# Altium PCB PCB1.PcbDoc
Units mil, origin at the board's own origin, x right, y up, seen from the top; angles counter-clockwise.
Board outline 3700 x 3405 mil, 4 copper layers (Top Layer, Layer 1, Layer 2, Bottom Layer), stack 23.756 mil thick; 98 components, 46 nets, 351 pads, 49 vias.
Unrouted connection lines stored in the file: 89.
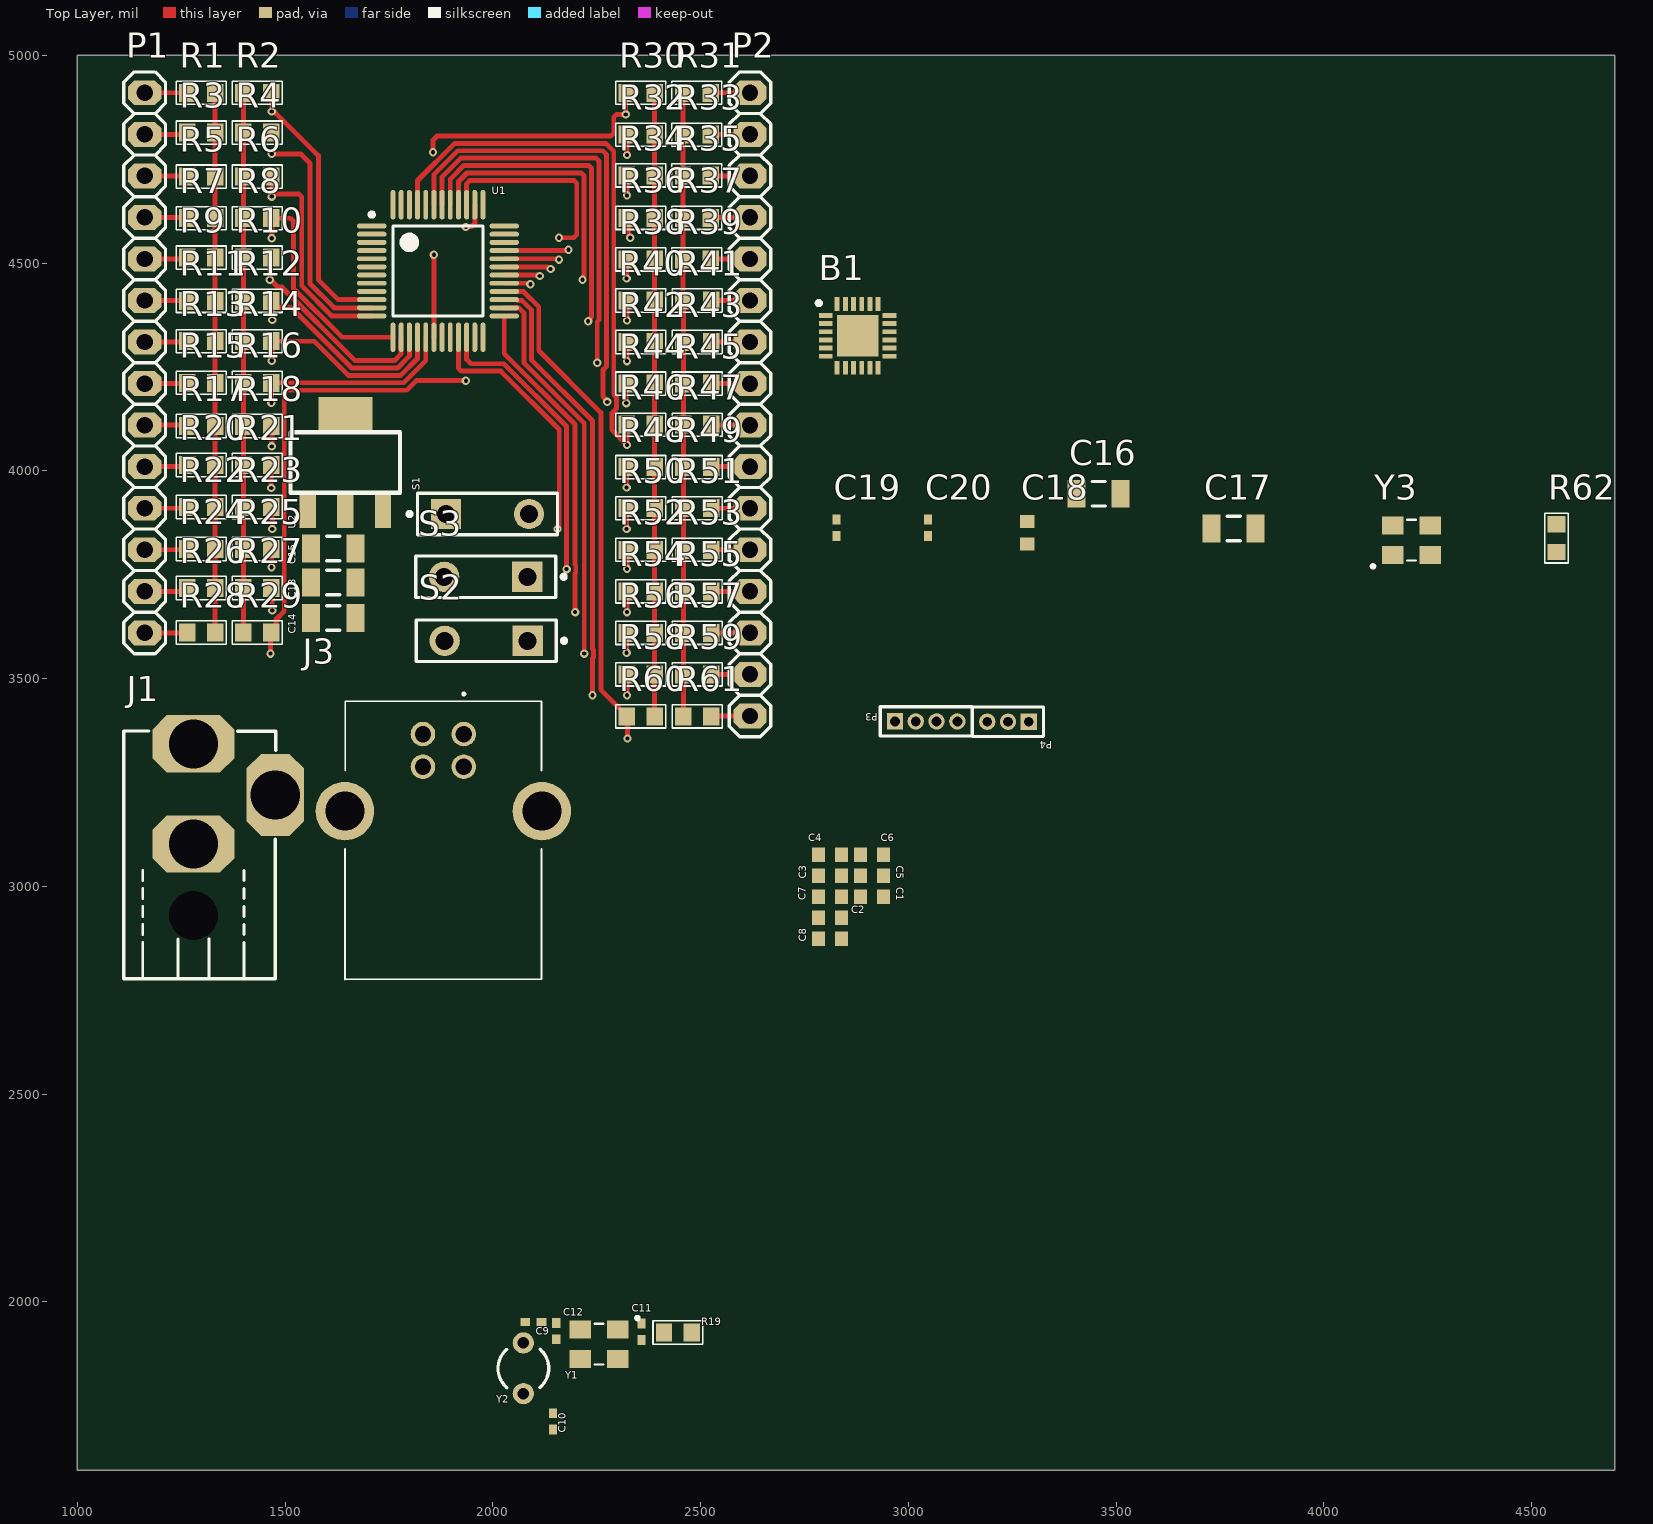
[diagram p0: Top Layer view]
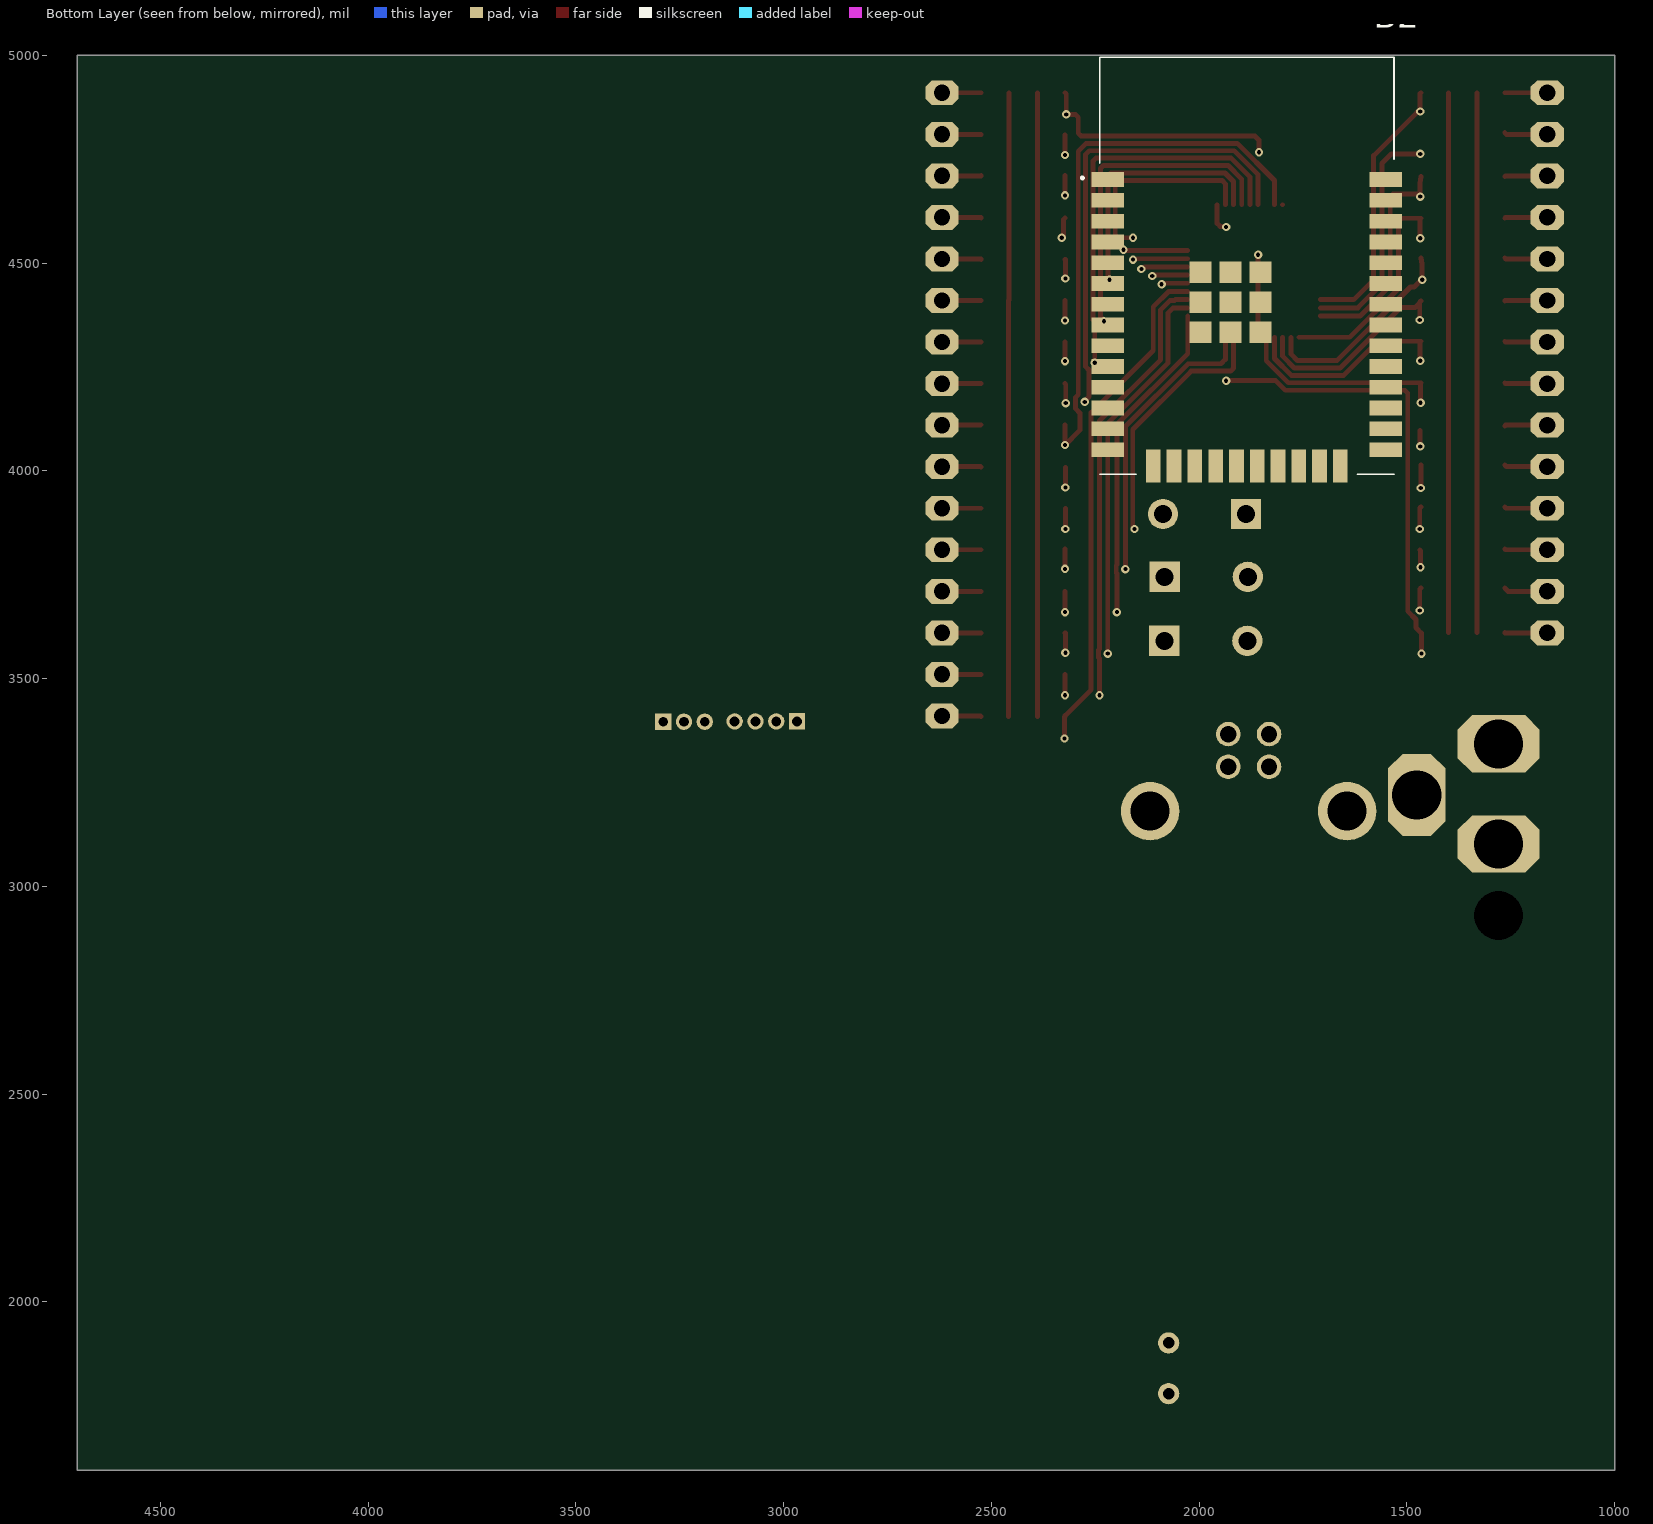
[diagram p1: Bottom Layer view, seen from below]
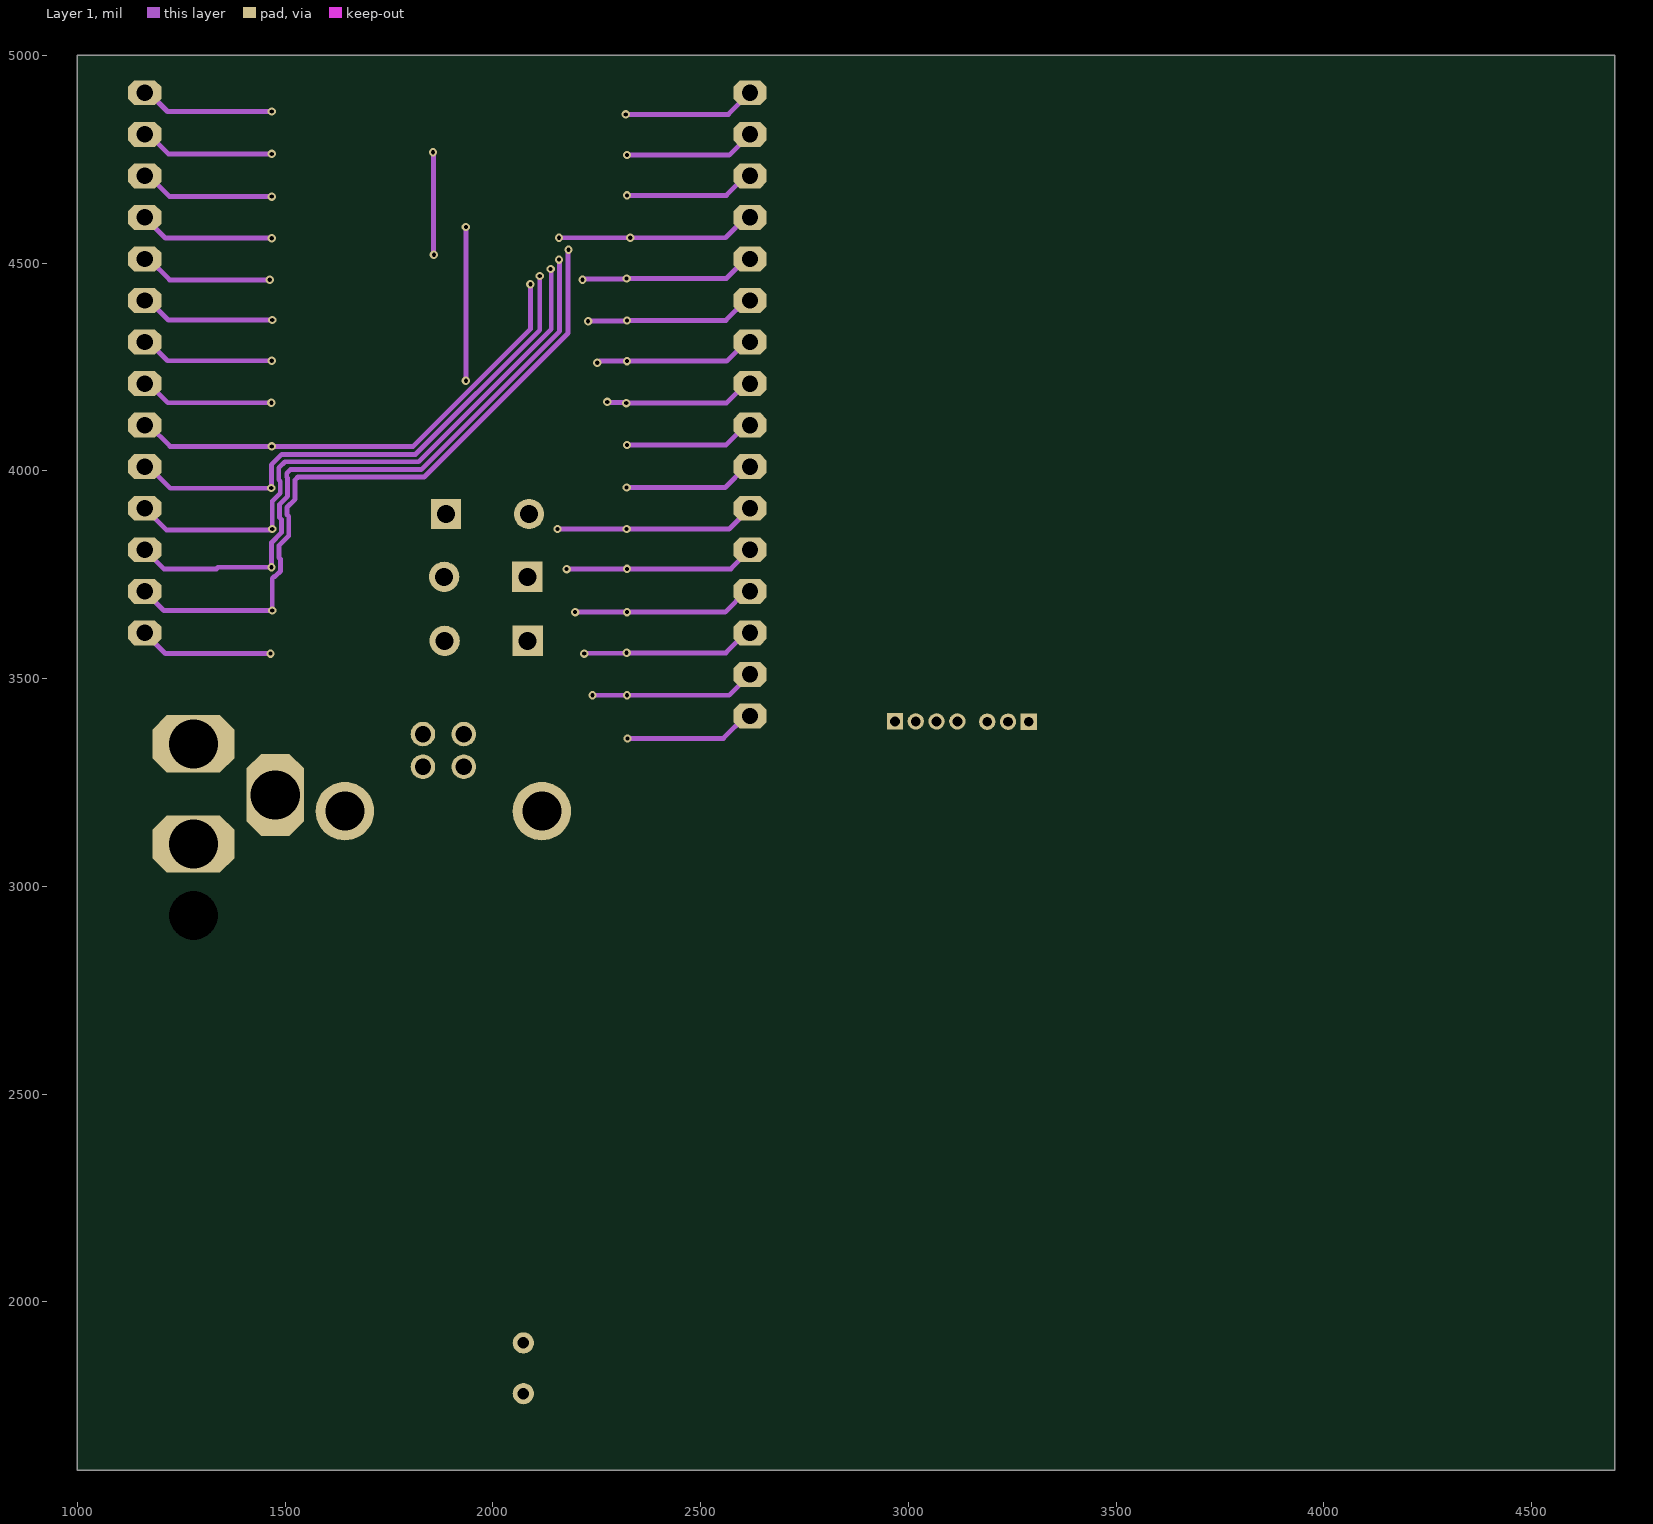
[diagram p2: Layer 1]

## Layer stack, top to bottom
Top Solder: solder mask 0.4, Solder Resist, Dk 3.5
Top Layer: signal copper 1.4
Dielectric 2: prepreg 2.8, PP-006, Dk 4.1
Layer 1: signal copper 1.378
Dielectric 1: dielectric 12.6, FR-4, Dk 4.8
Layer 2: signal copper 1.378
Dielectric 3: prepreg 2.8, PP-006, Dk 4.1
Bottom Layer: signal copper 1.4
Bottom Solder: solder mask 0.4, Solder Resist, Dk 3.5

## Board outline
1000,1595 1000,5000 4700,5000 4700,1595

## Design rules (kind name [scope] priority, off if disabled: settings)
Clearance [All] p1: gap=6 ignorepadtopadclearanceinfootprint=FALSE
Clearance Clearance_2 [All] p2: gap=10 ignorepadtopadclearanceinfootprint=FALSE except(0: Arc-Hole Track-Hole SMDPad-Hole THPad-Hole Via-Hole Fill-Hole Poly-Hole Region-Hole Text-Hole)
Clearance Clearance_1 [All] p3: gap=6 ignorepadtopadclearanceinfootprint=FALSE
PlaneConnect [All] p1: planeconnectstyle=Direct reliefexpansion=20 reliefentries=4 reliefconductorwidth=10 reliefairgap=10
PolygonConnect [All] p1: connectstyle=Direct reliefconductorwidth=10 reliefentries=4 polygonreliefangle="90 Angle" airgapwidth=10
RoutingVias [All] p1: holewidth=5 width=20 viastyle="Through Hole" minholewidth=5 minwidth=20 maxholewidth=28 maxwidth=50
SolderMaskExpansion [All] p1: expansion=4 istentingtop=FALSE
UnConnectedPin [All] p1:
Width [All] p1: maxlimit=40 minlimit=10 preferedwidth=10
29 further rules are at their usual default settings.

## Classes and differential pairs
component class ConnectionMCU: B1 B2 C16 C17 C18 C19 C20 J3 R62 S2 S3 Y3
component class PowerSupply: C13 C14 C15 J1 U2
component class MCU: C1 C2 C3 C4 C5 C6 C7 C8 C9 C10 C11 C12 P1 P2 P3 P4 R1 R2 R3 R4 R5 R6 R7 R8 R9 R10 R11 R12 R13 R14 R15 R16 R17 R18 R19 R20 R21 R22 R23 R24 R25 R26 R27 R28 R29 R30 R31 R32 R33 R34 R35 R36 R37 R38 R39 R40 R41 R42 R43 R44 R45 R46 R47 R48 R49 R50 R51 R52 R53 R54 R55 R56 R57 R58 R59 R60 R61 S1 U1 Y1 Y2

## Components (designator, comment, footprint, x,y, rotation, side; value= is the part's Value field where it differs from the comment)
B1 "CP2102N-A02-GQFN24" QFN50P400X400X80-25N-D 2878,4325 r0 top
B2 "ESP32-WROOM-32__16MB_" ESP32WROOM3216MB 1885.35,4493.91 r180 bottom
C1 "Cap Semi_1" 1608[0603]cap 2912.44,2975 r0 top value=10nF
C2 "Cap Semi_1" 1608[0603]cap 2811.44,2924.5 r180 top value=1uF
C3 "Cap Semi" 1608[0603]cap 2811.44,3025.5 r180 top value=100nF
C4 "Cap Semi" 1608[0603]cap 2811.44,3076 r180 top value=100nF
C5 "Cap Semi" 1608[0603]cap 2912.44,3025.5 r0 top value=100nF
C6 "Cap Semi" 1608[0603]cap 2912.44,3076 r0 top value=100nF
C7 "Cap Semi_1" 1608[0603]cap 2811.44,2975 r180 top value=4.7uF
C8 "Cap Semi_1" 1608[0603]cap 2811.44,2874 r180 top value=100nF
C9 "Cap Semi_4" 0402cap 2097.46,1951 r180 top value=10pF
C10 "Cap Semi_4" 0402cap 2145,1712 r270 top value=10pF
C11 "Cap Semi_4" 0402cap 2357.46,1928 r90 top value=10pF
C12 "Cap Semi_4" 0402cap 2152.46,1929.35 r270 top value=10pF
C13 "tantalum cap" C1206tancap 1616,3731 r0 top value=100uF
C14 "tantalum cap" C1206tancap 1616,3646 r0 top value=10uF
C15 "tantalum cap" C1206tancap 1616,3813 r0 top value=10uF
C16 "tantalum cap" C1206tancap 3458,3945 r0 top value=10uF
C17 "tantalum cap" C1206tancap 3783,3861 r0 top value=0.1uF
C18 "Cap Semi_1" 1608[0603]cap 3286,3851 r90 top value=0.1uF
C19 "Cap Semi_4" 0402cap 2827,3863 r90 top value=22pF
C20 "Cap Semi_4" 0402cap 3047,3863 r90 top value=22pF
J1 "DC_Jack" My_DC_Jack 1279.33,2973.91 r0 top
J3 "67068-8000" 670688000 1930.22,3366.43 r0 top
P1 "Header 14" My_1X14 1162,4260 r270 top
P2 "Header 16" My_1X16 2619,4160 r270 top
P3 "MHDR1X4" MHDR1X4body 2968,3397 r0 top
P4 "MHDR1X3" MHDR1X3body 3290,3396.24 r180 top
R1 "1K" MY_0603 1298,4910 r180 top
R2 "1K" MY_0603 1433,4910 r180 top
R3 "1K" MY_0603 1298,4814 r180 top
R4 "1K" MY_0603 1433,4814 r180 top
R5 "1K" MY_0603 1298,4708 r180 top
R6 "1K" MY_0603 1433,4708 r180 top
R7 "1K" MY_0603 1298,4608 r180 top
R8 "1K" MY_0603 1433,4608 r180 top
R9 "1K" MY_0603 1298,4513 r180 top
R10 "1K" MY_0603 1433,4513 r180 top
R11 "1K" MY_0603 1298,4409 r180 top
R12 "1K" MY_0603 1433,4409 r180 top
R13 "1K" MY_0603 1298,4312 r180 top
R14 "1K" MY_0603 1433,4312 r180 top
R15 "1K" MY_0603 1298,4212 r180 top
R16 "1K" MY_0603 1433,4212 r180 top
R17 "1K" MY_0603 1298,4108 r180 top
R18 "1K" MY_0603 1433,4108 r180 top
R19 "1K" MY_0603 2445.46,1926 r0 top
R20 "1K" MY_0603 1298,4014 r180 top
R21 "1K" MY_0603 1433,4014 r180 top
R22 "1K" MY_0603 1298,3913 r180 top
R23 "1K" MY_0603 1433,3913 r180 top
R24 "1K" MY_0603 1298,3812 r180 top
R25 "1K" MY_0603 1433,3812 r180 top
R26 "1K" MY_0603 1298,3718 r180 top
R27 "1K" MY_0603 1433,3718 r180 top
R28 "1K" MY_0603 1298,3611 r180 top
R29 "1K" MY_0603 1433,3611 r180 top
R30 "1K" MY_0603 2356,4910 r180 top
R31 "1K" MY_0603 2491,4910 r180 top
R32 "1K" MY_0603 2356,4809 r180 top
R33 "1K" MY_0603 2491,4809 r180 top
R34 "1K" MY_0603 2356,4711 r180 top
R35 "1K" MY_0603 2491,4711 r180 top
R36 "1K" MY_0603 2356,4609 r180 top
R37 "1K" MY_0603 2491,4609 r180 top
R38 "1K" MY_0603 2356,4509 r180 top
R39 "1K" MY_0603 2491,4509 r180 top
R40 "1K" MY_0603 2356,4410 r180 top
R41 "1K" MY_0603 2492,4410 r180 top
R42 "1K" MY_0603 2356,4310 r180 top
R43 "1K" MY_0603 2492,4310 r180 top
R44 "1K" MY_0603 2356,4210 r180 top
R45 "1K" MY_0603 2492,4210 r180 top
R46 "1K" MY_0603 2356,4111 r180 top
R47 "1K" MY_0603 2492,4111 r180 top
R48 "1K" MY_0603 2356,4009 r180 top
R49 "1K" MY_0603 2492,4009 r180 top
R50 "1K" MY_0603 2356,3910 r180 top
R51 "1K" MY_0603 2492,3910 r180 top
R52 "1K" MY_0603 2356,3810 r180 top
R53 "1K" MY_0603 2492,3810 r180 top
R54 "1K" MY_0603 2356,3710 r180 top
R55 "1K" MY_0603 2492,3710 r180 top
R56 "1K" MY_0603 2356,3610 r180 top
R57 "1K" MY_0603 2492,3610 r180 top
R58 "1K" MY_0603 2356,3510 r180 top
R59 "1K" MY_0603 2492,3510 r180 top
R60 "1K" MY_0603 2356,3409 r180 top
R61 "1K" MY_0603 2492,3409 r180 top
R62 "1K" MY_0603 4560,3838 r90 top
S1 "SW-PB" SPST-2_body 1987,3896 r0 top
S2 "SW-PB" SPST-2_body 1984,3591 r180 top
S3 "SW-PB" SPST-2_body 1983,3745 r180 top
U1 "STM32F103C8T6" STM-LQFP48_N 1868,4481 r0 top
U2 "lm1117" "4-Pin SOT" 1776.89,4020.17 r0 top
Y1 "ECS-80-12-33-JGN-TR" 8MHZCrystall 2255.46,1898 r180 top
Y2 "XTAL" 32768 2073.46,1839.98 r0 top
Y3 "ECS-80-12-33-JGN-TR" 8MHZCrystall 4211,3833 r0 top value="40 MHZ"

## Footprints (in the part's own frame and the unit in brackets; to place one, negate y for a bottom-side part, rotate by r counter-clockwise, add the part's x,y. Pads: shape width x height; smd on the part's side, far side on the other; paste and mask are expansions set on the pad)
"4-Pin SOT" [mm]
  rect 1x2.2 smd: 0(-1.05,-2.9) 1(-5.65,-2.9) 2(-3.35,-2.9)
  rect 3.3x2.2 smd: 2(-3.35,2.9)
  silkscreen extent -6.7,-1.85 0,1.85, body extent -6.6,-3.25 -0.1,3.75, height 1.61
8MHZCrystall [mm]
  rect 1.3x1.1 smd: 1(-1.15,-0.9) 2(1.15,-0.9) 3(1.15,0.9) 4(-1.15,0.9)
  silkscreen extent -2.45,-1.7 0.27,1.25, body extent -0.95,-0.8 1.05,0.8, height 0.49
0402cap [mm]
  rect 0.6x0.5 smd: 1(-0.5,0) 2(0.5,0)
  body extent -0.5,-0.25 0.5,0.25, height 0.51
1608[0603]cap [mm]
  rect 0.8x0.9 smd: 1(-0.7,0) 2(0.7,0)
  body extent -0.77,-0.4 0.83,0.4, height 0.9
32768 [mm]
  round 1.3 hole 0.7: 1(0,1.55) 2(0,-1.55)
  silkscreen extent -1.55,-1.19 1.55,1.17, body extent -1.63,-1.75 1.57,1.7, height 9.54
670688000 [mm]
  round 1.5 hole 1: 1(0,0) 2(-2.5,0) 3(-2.5,-2) 4(0,-2)
  round 3.57 hole 2.38: MH1(4.77,-4.71) MH2(-7.27,-4.71)
  silkscreen extent -7.27,-15 4.77,2.5
C1206tancap [mm]
  rect 1.1x1.7 smd: 1(-1.35,0) 2(1.35,0)
  silkscreen extent -0.4,-0.75 0.4,0.75, body extent -1.7,-0.9 1.7,0.9, height 1.8
ESP32WROOM3216MB [mm]
  rect 2x0.9 smd: 1(-8.5,5.26) 2(-8.5,3.99) 3(-8.5,2.72) 4(-8.5,1.45) 5(-8.5,0.18) 6(-8.5,-1.09) 7(-8.5,-2.36) 8(-8.5,-3.63) 9(-8.5,-4.9) 10(-8.5,-6.17) 11(-8.5,-7.44) 12(-8.5,-8.71) 13(-8.5,-9.98) 14(-8.5,-11.25) 25(8.5,-11.25) 26(8.5,-9.98) 27(8.5,-8.71) 28(8.5,-7.44) 29(8.5,-6.17) 30(8.5,-4.9) 31(8.5,-3.63) 32(8.5,-2.36) 33(8.5,-1.09) 34(8.5,0.18) 35(8.5,1.45) 36(8.5,2.72) 37(8.5,3.99) 38(8.5,5.26)
  rect 0.9x2 smd: 15(-5.715,-12.25) 16(-4.445,-12.25) 17(-3.175,-12.25) 18(-1.905,-12.25) 19(-0.635,-12.25) 20(0.635,-12.25) 21(1.905,-12.25) 22(3.175,-12.25) 23(4.445,-12.25) 24(5.715,-12.25)
  rect 1.33x1.33 smd: 39(-2.835,-0.405) 40(-1,-0.405) 41(0.835,-0.405) 42(-2.835,-2.24) 43(-1,-2.24) 44(0.835,-2.24) 45(-2.835,-4.075) 46(-1,-4.075) 47(0.835,-4.075)
  silkscreen extent -10.1,-12.75 9,12.75
MHDR1X3body [mm]
  rect 1x1 hole 0.6: 1(0,0)
  round 1 hole 0.6: 2(1.27,0) 3(2.54,0)
  silkscreen extent -0.9,-0.9 3.44,0.9, body extent -0.64,-1.2 3.17,1.2, height 5
MHDR1X4body [mm]
  rect 1x1 hole 0.6: 1(0,0)
  round 1 hole 0.6: 2(1.27,0) 3(2.54,0) 4(3.81,0)
  silkscreen extent -0.9,-0.9 4.71,0.9, body extent -0.66,-1.22 4.42,1.28, height 4.61
My_1X14 [mil]
  oct 60x80 hole 39.37: 1(-650,0) 2(-550,0) 3(-450,0) 4(-350,0) 5(-250,0) 6(-150,0) 7(-50,0) 8(50,0) 9(150,0) 10(250,0) 11(350,0) 12(450,0) 13(550,0) 14(650,0)
  silkscreen extent -700,-50 700,50, body extent -700,-49 696,49, height 323
My_1X16 [mil]
  oct 60x80 hole 39.37: 1(-750,0) 2(-650,0) 3(-550,0) 4(-450,0) 5(-350,0) 6(-250,0) 7(-150,0) 8(-50,0) 9(50,0) 10(150,0) 11(250,0) 12(350,0) 13(450,0) 14(550,0) 15(650,0) 16(750,0)
  silkscreen extent -800,-50 800,50, body extent -800,-49 796,49, height 323
MY_0603 [mm]
  rect 1x1.1 smd: 1(-0.85,0) 2(0.85,0)
  silkscreen extent -1.52,-0.71 1.52,0.71, body extent -0.8,-0.4 0.8,0.4, height 0.44
My_DC_Jack [mm]
  round 0 hole 3: 0(0,-1.118)
  oct 5x3.5 hole 3: 1(0,9.373) 3(0,3.251)
  oct 3.5x5 hole 3: 2(5.004,6.248)
  silkscreen extent -4.25,-4.98 5.03,10.16, body extent -4.32,-5.04 5.08,10.16, height 11.02
QFN50P400X400X80-25N-D [mm]
  rect 0.85x0.3 smd: 1(-1.95,1.25) 2(-1.95,0.75) 3(-1.95,0.25) 4(-1.95,-0.25) 5(-1.95,-0.75) 6(-1.95,-1.25) 13(1.95,-1.25) 14(1.95,-0.75) 15(1.95,-0.25) 16(1.95,0.25) 17(1.95,0.75) 18(1.95,1.25)
  rect 0.3x0.85 smd: 7(-1.25,-1.95) 8(-0.75,-1.95) 9(-0.25,-1.95) 10(0.25,-1.95) 11(0.75,-1.95) 12(1.25,-1.95) 19(1.25,1.95) 20(0.75,1.95) 21(0.25,1.95) 22(-0.25,1.95) 23(-0.75,1.95) 24(-1.25,1.95)
  rect 2.55x2.55 smd: 25(0,0)
  silkscreen extent -2.5,1.88 -2.25,2.12
SPST-2_body [mm]
  rect 1.85x1.85 hole 1.1: 1(-2.54,0)
  round 1.85 hole 1.1: 2(2.54,0)
  silkscreen extent -4.89,-1.27 4.28,1.27, body extent -3.93,-1.75 3.83,1.75, height 5.25
STM-LQFP48_N [mm]
  oval 1.8x0.3 smd: 1(-4.05,2.75) 2(-4.05,2.25) 3(-4.05,1.75) 4(-4.05,1.25) 5(-4.05,0.75) 6(-4.05,0.25) 7(-4.05,-0.25) 8(-4.05,-0.75) 9(-4.05,-1.25) 10(-4.05,-1.75) 11(-4.05,-2.25) 12(-4.05,-2.75) 25(4.05,-2.75) 26(4.05,-2.25) 27(4.05,-1.75) 28(4.05,-1.25) 29(4.05,-0.75) 30(4.05,-0.25) 31(4.05,0.25) 32(4.05,0.75) 33(4.05,1.25) 34(4.05,1.75) 35(4.05,2.25) 36(4.05,2.75)
  oval 0.3x1.8 smd: 13(-2.75,-4.05) 14(-2.25,-4.05) 15(-1.75,-4.05) 16(-1.25,-4.05) 17(-0.75,-4.05) 18(-0.25,-4.05) 19(0.25,-4.05) 20(0.75,-4.05) 21(1.25,-4.05) 22(1.75,-4.05) 23(2.25,-4.05) 24(2.75,-4.05) 37(2.75,4.05) 38(2.25,4.05) 39(1.75,4.05) 40(1.25,4.05) 41(0.75,4.05) 42(0.25,4.05) 43(-0.25,4.05) 44(-0.75,4.05) 45(-1.25,4.05) 46(-1.75,4.05) 47(-2.25,4.05) 48(-2.75,4.05)
  silkscreen extent -4.17,-2.75 2.75,3.57, body extent -4.5,-4.5 4.5,4.5, height 1.56

## Part data
B1: "USB Interface IC USB to UART bridge - QFN24", Manufacturer_Name="Silicon Labs", Mouser Part Number=634-CP2102NA02GQFN24, Arrow Part Number=CP2102N-A02-GQFN24, Arrow Price/Stock=https://www.arrow.com/en/products/cp2102n-a02-gqfn24/silicon-labs?region=nac, Datasheet Link=https://componentsearchengine.com/Datasheets/1/CP2102N-A02-GQFN24.pdf, Geometry.Height=0.8mm, Manufacturer_Part_Number=CP2102N-A02-GQFN24, Mouser Price/Stock=https://www.mouser.co.uk/ProductDetail/Silicon-Labs/CP2102N-A02-GQFN24?qs=u16ybLDytRYKabtL%2FE7DZA%3D%3D
B2: "WiFi Modules (802.11)", Manufacturer_Name="Espressif Systems", Manufacturer_Part_Number="ESP32-WROOM-32 (16MB)", Mouser Part Number=356-ESPWROOM3216MB, Datasheet Link=https://www.espressif.com/sites/default/files/documentation/esp32_datasheet_en.pdf, Geometry.Height=3.2mm, Mouser Price/Stock=https://www.mouser.co.uk/ProductDetail/Espressif-Systems/ESP32-WROOM-32-16MB?qs=w%2Fv1CP2dgqrcPyEPuQvO1A%3D%3D
C1: library part "Cap Semi_1_2", "Capacitor (Semiconductor SIM Model)", LatestRevisionDate=29-May-2009, LatestRevisionNote="IPC-7351 Footprint Added.", PackageDescription="Chip Capacitor", PackageReference=C1206, Published=8-Jun-2000, Publisher="Altium Limited"
C2: library part "Cap Semi_1_3", "Capacitor (Semiconductor SIM Model)", LatestRevisionDate=29-May-2009, LatestRevisionNote="IPC-7351 Footprint Added.", PackageDescription="Chip Capacitor", PackageReference=C1206, Published=8-Jun-2000, Publisher="Altium Limited"
C3 C4 C5 C6 C8 C9 C10 C11 C12 C18 C19 C20: "Capacitor (Semiconductor SIM Model)", LatestRevisionDate=29-May-2009, LatestRevisionNote="IPC-7351 Footprint Added.", PackageDescription="Chip Capacitor", PackageReference=C1206, Published=8-Jun-2000, Publisher="Altium Limited"
C7: library part "Cap Semi_1_1", "Capacitor (Semiconductor SIM Model)", LatestRevisionDate=29-May-2009, LatestRevisionNote="IPC-7351 Footprint Added.", PackageDescription="Chip Capacitor", PackageReference=C1206, Published=8-Jun-2000, Publisher="Altium Limited"
C13 C16 C17: library part "Cap Semi_6", "Capacitor (Semiconductor SIM Model)", LatestRevisionDate=29-May-2009, LatestRevisionNote="IPC-7351 Footprint Added.", PackageDescription="Chip Capacitor", PackageReference=C1206, Published=8-Jun-2000, Publisher="Altium Limited"
C14 C15: library part "Cap Semi_5", "Capacitor (Semiconductor SIM Model)", LatestRevisionDate=29-May-2009, LatestRevisionNote="IPC-7351 Footprint Added.", PackageDescription="Chip Capacitor", PackageReference=C1206, Published=8-Jun-2000, Publisher="Altium Limited"
J1: ASiD Part Number=DC_Jack-AS
J3: "USB Connectors USB TYPE B RECEPT. Rt.Angle Gold Flash", Manufacturer_Name=Molex, Mouser Part Number=538-67068-8000, Datasheet Link=https://www.molex.com/pdm_docs/sd/670688000_sd.pdf, Geometry.Height=11mm, Manufacturer_Part_Number=67068-8000, Mouser Price/Stock=https://www.mouser.co.uk/ProductDetail/Molex/67068-8000?qs=N76qWb2E9MLsLGBiHvIzzg%3D%3D
P1: "Header, 14-Pin", ASiD Part Number="Header 14-AS"
P2: "Header, 16-Pin", ASiD Part Number="Header 16-AS"
P3: "Header, 4-Pin", LatestRevisionDate=17-Jul-2002, LatestRevisionNote="Re-released for DXP Platform.", Publisher="Altium Limited"
P4: "Header, 3-Pin", LatestRevisionDate=17-Jul-2002, LatestRevisionNote="Re-released for DXP Platform.", Publisher="Altium Limited"
R1 R2 R3 R4 R5 R6 R7 R8 R9 R10 R11 R12 R13 R14 R15 R16 R17 R18 R19 R20 R21 R22 R23 R24 R25 R26 R27 R28 R29 R30 R31 R32 R33 R34 R35 R36 R37 R38 R39 R40 R41 R42 R43 R44 R45 R46 R47 R48 R49 R50 R51 R52 R53 R54 R55 R56 R57 R58 R59 R60 R61 R62: library part Res, "Standard resistor", ASiD Part Number=Res-AS
S1 S2 S3: "Switch", LatestRevisionDate=17-Jul-2002, LatestRevisionNote="Re-released for DXP Platform.", PackageDescription="Switch; 2 Leads", PackageReference=SPST-2, Published=24-Mar-1999, Publisher="Altium Limited"
U1: "ARM Cortex-M3 32-bit MCU, 64 KB Flash, 20 KB Internal RAM, 37 I/Os, 48-pin LQFP, -40 to 85 degC, Tray", I/Os (High Current)=37, Operating Frequency(F) (Processor speed) (MHz)=72, Supplier Part Number 1=497-6063-ND, Supply Voltage(Vcc) min (V)=2, A/D Converter="2x12-bit (10 Channel)", ComponentLink1Description="Manufacturer URL", ComponentLink1URL=http://www.st.com/web/en/home.html, ComponentLink2Description=Datasheet, ComponentLink2URL=http://www.st.com/st-web-ui/static/active/en/resource/technical/document/datasheet/CD00161566.pdf, ComponentLink3Description="Package Specification", ComponentLink3URL=http://www.st.com/st-web-ui/static/active/en/resource/technical/document/datasheet/DM00058181.pdf, Core="ARM Cortex-M3", DatasheetVersion="Rev. 16", FLASH Size (Prog) (kB)=64, Internal RAM Size (kB)=20, Mounting Technology="Surface Mount", PackageDescription="48-Pin Low Profile Quad Flat Package, 7 x 7 mm Body, 0.5 mm Pitch", PackageReference=LQFP48, PackageVersion="Rev. 6, 06/2013", Packing=Tray, PartNumber=STM32F103C8T6, Supplier 1=Digi-Key, Supplier 2=Farnell, Supplier 3=Newark, Supplier 4=Newark, Supplier 5=Mouser, Supplier Part Number 2=1447637, Supplier Part Number 3=59M2182, Supplier Part Number 4=57P1222, Supplier Part Number 5=511-STM32F103C8T6
U2: "The LM1117 is a low dropout voltage regulator with a / dropout of 1.2 V at 800 mA of load current. / The LM1117 is available in an adjustable version, / which can set the output voltage from 1.25 to 13.8 V / with only two external resistors. In addition, it is / available in five fixed voltages, 1.8 V, 2.5 V, 3.3 V, / and 5 V. / The LM1117 offers current limiting and thermal / shutdown. Its circuit includes a Zener trimmed / bandgap reference to assure output voltage accuracy / to within ±1%. / A minimum of 10-µF tantalum capacitor is required at / the output to improve the transient response and / stability.", output voltag=3.3V, ComponentLink1Description=datasheet, ComponentLink1URL=https://www.ti.com/lit/gpn/lm1117
Y1 Y3: "8MHz Â±20ppm Crystal 12pF 400 Ohms 4-SMD, No Lead", Package="SMD-4 ECS International", Availability=Warning, BuyPart=https://www.snapeda.com/parts/ECS-80-12-33-JGN-TR/ECS%20Inc./view-part/4477300/?ref=eda, MF="ECS Inc.", Mouser-Purchase-URL=https://snapeda.com/shop?store=Mouser&id=4477300, MP=ECS-80-12-33-JGN-TR, Price=None, SnapEDA_Link=https://www.snapeda.com/parts/ECS-80-12-33-JGN-TR/ECS%20Inc./view-part/4477300/?ref=snap
Y2: "Crystal Oscillator", LatestRevisionDate=17-Jul-2002, LatestRevisionNote="Re-released for DXP Platform.", PackageDescription="Crystal, Thru-Hole; 2 Leads; Body 3.1 x 8.2 mm (Dia.xH)", PackageReference=R38, Published=8-Jun-2000, Publisher="Altium Limited"

## Via types
v1: diameter 20, hole 10, Top Layer to Bottom Layer, 49 vias

## Nets (pads, with @x,y where several pads share a name; then routed paths per layer and width w, separated by ;. In a path a pad name is that pad's centre, name@x,y a point inside that pad or via, vN(x,y) a via of type N, cw(c..) or ccw(c..) an arc to the next point about the centre after c; other vN are vias at no path point)
32KHz_01: C9.2 U1.3 Y2.1
32KHz_02: C10.2 U1.4 Y2.2
+9V: C13.2 C14.2 J1.1 J3.1 U2.0
BOOT0: P4.2 U1.44
EN: B2.3 C18.2 S2.2
ESP_RST: B2.25 S3.2
GND: B2.1 C1.1 C2.1 C3.1 C4.1 C5.1 C6.1 C7.1 C8.1 C9.1 C10.1 C11.1 C12.1 C13.1 C14.1 C15.1 C16.1 C17.1 C18.1 C19.1 C20.1 J1.2 J1.3 J3.4 P3.4 P4.3 R2.2 R4.2 R6.2 R8.2 R10.2 R12.2 R14.2 R16.2 R18.2 R21.2 R23.2 R25.2 R27.2 R29.2 R31.2 R33.2 R35.2 R37.2 R39.2 R41.2 R43.2 R45.2 R47.2 R49.2 R51.2 R53.2 R55.2 R57.2 R59.2 R61.2 R62.1 S1.1 S2.1 S3.1 U1.8 U1.23 U1.35 U1.47 U2.1 Y1.2 Y1.4 Y3.2 Y3.4 | length 2800.4
  Top Layer w11.8: R29.2 R27.2 R25.2 R23.2 R21.2 R18.2 R16.2 R14.2 R12.2 R8.2 R6.2 R4.2 R2.2 ; R31.2 R33.2 R35.2 R37.2 R39.2 2457.54,4411 R41.2 R43.2 R45.2 R47.2 R49.2 R51.2 R53.2 R55.2 R57.2 R59.2 R61.2
IN/OUT: C11.2 R19.1 Y1.1
NetR19_2: R19.2 U1.6
NRST: C8.2 S1.2 U1.7
OUT/IN: C12.2 U1.5 Y1.3
PA0: P1.1 R1.2 R2.1 U1.10 | length 1075.9
  Top Layer w11.8: P1.1 R1.2 ; R2.1 1468,4908.46 v1(1468,4865) 1469.57,4863.43 1475.2,4863.43 1580,4758.63 1580,4460 1627.9,4412.1 U1.10
  Layer 1 w11.8: P1.1 1172,4910 1217,4865 v1(1468,4865)
PA1: P1.2 R3.2 R4.1 U1.11 | length 993.4
  Top Layer w11.8: P1.2 1260.54,4810 R3.2 ; v1(1468,4763) 1537,4763 1560,4740 1560,4450.35 1617.93,4392.42 U1.11
  Layer 1 w11.8: P1.2 1172,4810 1219,4763 v1(1468,4763)
PA2: P1.3 R5.2 R6.1 U1.12 | length 968.2
  Top Layer w11.8: P1.3 1262.54,4710 R5.2 ; R6.1 1468,4692.25 v1(1468,4660) 1470.22,4660 1476.38,4666.16 1533.09,4666.16 1540,4659.25 1540,4445.17 1612.44,4372.73 U1.12
  Layer 1 w11.8: P1.3 1172,4710 1222,4660 v1(1468,4660)
PA3: P1.4 R7.2 R8.1 U1.13 | length 985.6
  Top Layer w11.8: P1.4 1262.54,4610 R7.2 ; v1(1468,4560) 1468,4606.46 R8.1 1513.09,4608 1520,4601.09 1520,4439 1637.45,4321.55 U1.13@1759.73,4321.55
  Layer 1 w11.8: P1.4 1212,4560 v1(1468,4560)
PA4: P1.5 R9.2 R10.1 U1.14 | length 923.1
  Top Layer w11.8: P1.5 1261.54,4510 R9.2 ; R10.1 1463.98,4497.25 1463.98,4465.8 1463.98,4460.76 v1(1463,4459.77) 1465.22,4459.77 1482.44,4442.55 1491.27,4442.55 1668.43,4265.4 1763.39,4265.4 1779.42,4281.43 U1.14@1779.42,4321.55
  Layer 1 w11.8: P1.5 1172,4510 1222.23,4459.77 v1(1463,4459.77)
PA5: P1.6 R11.2 R12.1 U1.15 | length 928.9
  Top Layer w11.8: P1.6 1263.54,4410 R11.2 ; R12.1 1469,4406.46 v1(1469,4363) ; R12.1@1469,4404.5 1480.25,4393.25 1514.75,4393.25 1660.4,4247.6 1770.76,4247.6 1799.1,4275.94 U1.15@1799.1,4321.55
  Layer 1 w11.8: P1.6 1172,4410 1219,4363 v1(1469,4363)
PA6: P1.7 R13.2 R14.1 U1.16 | length 929.9
  Top Layer w11.8: P1.7 1262.54,4310 R13.2 ; v1(1468,4265) 1468,4310.46 R14.1 1570,4312 1652.2,4229.8 1778.13,4229.8 1818.79,4270.45 U1.16@1818.79,4321.55
  Layer 1 w11.8: P1.7 1172,4310 1217,4265 v1(1468,4265)
PA7: P1.8 R15.2 R16.1 U1.17 | length 926.2
  Top Layer w11.8: P1.8 1262.54,4210 R15.2 ; v1(1467,4164) 1467,4211.46 R16.1 1785.51,4212 1838.47,4264.97 U1.17
  Layer 1 w11.8: P1.8 1172,4210 1218,4164 v1(1467,4164)
PA8: P1.9 R17.2 R18.1 U1.29 | length 1379.2
  Top Layer w11.8: P1.9 1262.54,4110 R17.2 ; v1(1468,4059) R18.1@1468,4096.66 ; U1.29 2085.83,4451.47 2088.04,4449.26 v1(2090.26,4449.26)
  Layer 1 w11.8: P1.9 1172,4110 1223.2,4058.8 1341.89,4058.8 1342.09,4059 v1(1468,4059) 1808,4059 2090.26,4341.26 v1(2090.26,4449.26)
PA9: P1.10 R20.2 R21.1 U1.30 | length 1539.4
  Top Layer w11.8: P1.10 1260.54,4010 R20.2 ; R21.1 R21.1 v1(1466.51,3958.49) ; U1.30 2108.57,4471.16 2110.78,4468.94 v1(2113,4468.94)
  Layer 1 w11.8: P1.10 1172,4010 1224,3958 1466.03,3958 v1(1466.51,3958.49) ; v1@1467,3958 1467,4014.54 1492.26,4039.8 1813.97,4039.8 2113,4338.83 v1(2113,4468.94)
PA10: P1.11 R22.2 R23.1 U1.31 | length 1696.3
  Top Layer w11.8: P1.11 1261.54,3910 R22.2 ; R23.1 1469,3910.46 v1(1469,3859.97) ; U1.31 2131.94,4490.84 2136.78,4486 v1(2139,4486)
  Layer 1 w11.8: P1.11 1214,3858 v1@1469,3858 ; v1(1469,3859.97) 1469,3927 1488.41,3946.41 1488.41,3974.98 1484.8,3978.6 1484.8,4007.16 1499.64,4022 1821.35,4022 2140.57,4341.22 2140.57,4484.43 v1(2139,4486)
PA11: P1.12 R24.2 R25.1 U1.32 | length 1822
  Top Layer w11.8: P1.12 1262.54,3810 R24.2 ; v1(1467.23,3768.03) 1467.23,3807.69 R25.1@1469,3809.46 ; U1.32 2150.99,4510.53 2151.63,4509.88 2157.43,4509.88 v1(2159,4508.31)
  Layer 1 w11.8: P1.12 1208,3764 1334.49,3764 1338.52,3768.03 v1(1467.23,3768.03) 1467.23,3827.23 1490.9,3850.9 1490.9,3883.21 1486.8,3887.31 1486.8,3919.63 1506.21,3939.04 1506.21,3982.35 1504.03,3984.54 1504.03,3994.31 1512.72,4003 1827.52,4003 2160.9,4336.38 2160.9,4495.07 2160.57,4495.4 2160.57,4506.74 v1(2159,4508.31)
PA12: P1.13 R26.2 R27.1 U1.33 | length 1991.8
  Top Layer w11.8: P1.13 1256.54,3710 R26.2 ; R27.1 1469,3715.46 v1(1469,3664) ; U1.33 2174.41,4530.21 2174.63,4530.43 2180.43,4530.43 v1(2182,4532)
  Layer 1 w11.8: P1.13 1208,3664 v1(1469,3664) 1469,3741.22 1473.91,3746.13 1476.3,3746.13 1489.13,3758.96 1489.13,3787.36 1485.03,3791.46 1485.03,3819.86 1508.7,3843.53 1508.7,3890.59 1504.6,3894.69 1504.6,3912.25 1524.01,3931.67 1524.01,3978.29 1530.93,3985.2 1834.89,3985.2 2180.9,4331.21 2180.9,4530.9 v1(2182,4532)
PA15: P1.14 R28.2 R29.1 U1.38 | length 1956.9
  Top Layer w11.8: P1.14 1263.54,3610 R28.2 ; v1(1465,3560) 1465,3609.54 1478.1,3622.64 1478.1,3642.13 1498.05,3662.08 1498.05,4187.09 1504.96,4194 1792.68,4194 1815.67,4216.99 v1(1935.01,4216.99) ; v1(1935,4587) 1936.57,4588.57 1949.67,4588.57 1956.58,4595.48 U1.38
  Layer 1 w11.8: P1.14 1212,3560 v1(1465,3560) ; v1(1935.01,4216.99) v1(1935,4587)
PB0: P2.1 R30.2 R31.1 U1.18 | length 1457.7
  Top Layer w11.8: v1(1856.01,4766.99) 1856.01,4796.01 1866,4806 2284.04,4806 2290.95,4812.91 2290.95,4851.09 2297.86,4858 v1@2322.22,4858 ; v1(1858,4520.15) 1858.16,4519.99 U1.18 ; v1(2320,4858) 2320,4907.46 R30.2 ; R31.1 P2.1
  Layer 1 w11.8: v1(1856.01,4766.99) 1857.01,4765.99 1857.01,4521.14 v1(1858,4520.15) ; v1(2320,4858) 2567,4858 P2.1
PB1: P2.2 R32.2 R33.1 U1.19 | length 460.9
  Top Layer w11.8: R32.2 2323,4808.54 v1(2323,4760) ; R33.1 2525.46,4810 P2.2
  Layer 1 w11.8: v1(2323,4760) 2569,4760 P2.2
PB2: P2.3 R34.2 R35.1 U1.20 | length 458.6
  Top Layer w11.8: R34.2 2323,4710.54 v1(2323,4663) ; R35.1 2525.46,4710 P2.3
  Layer 1 w11.8: v1(2323,4663) 2562,4663 2609,4710 P2.3
PB3: P2.4 R36.2 R37.1 U1.39 | length 1118.8
  Top Layer w11.8: U1.39@1936.9,4640.45 1936.9,4691.03 1945.07,4699.2 2195.04,4699.2 2201.95,4692.29 2201.95,4567.91 2195.04,4561 v1(2159,4561) ; R36.2 2326.8,4604.74 2326.8,4567.32 2330.9,4563.22 v1(2330.9,4561) ; R37.1 2525.46,4610 P2.4
  Layer 1 w11.8: v1(2159,4561) 2560,4561 2609,4610 P2.4
PB4: P2.5 R38.2 R39.1 U1.40 | length 1187
  Top Layer w11.8: U1.40@1917.22,4640.45 1917.22,4669.98 1917.22,4696.52 1937.69,4717 2212.84,4717 2219.75,4710.09 2219.75,4466.32 2215.65,4462.22 v1(2215.65,4460) ; v1(2322,4463) 2322,4508.46 R38.2 ; R39.1 2525.46,4510 P2.5
  Layer 1 w11.8: v1(2215.65,4460) 2217.15,4461.5 2320.5,4461.5 v1(2322,4463) 2562,4463 2609,4510 P2.5
PB5: P2.6 R40.2 R41.1 U1.41 | length 1341.4
  Top Layer w11.8: U1.41@1897.53,4640.45 1897.53,4702.01 1930.32,4734.8 2230.64,4734.8 2237.55,4727.89 2237.55,4370.42 2229.35,4362.22 v1(2229.35,4360) ; R40.2 2323,4409.54 v1(2323,4362) ; R41.1 P2.6
  Layer 1 w11.8: v1(2229.35,4360) 2230.35,4361 2322,4361 v1(2323,4362) 2561,4362 2609,4410 P2.6
PB6: P2.7 R42.2 R43.1 U1.42 | length 1481.7
  Top Layer w11.8: U1.42 1877.84,4707.5 1922.95,4752.6 2248.44,4752.6 2255.35,4745.69 2255.35,4363.05 2251.25,4358.95 v1(2251.25,4260) ; R42.2 2323,4309.54 v1(2323,4264) ; R43.1 P2.7
  Layer 1 w11.8: v1(2251.25,4260) 2253.47,4260 2257.47,4264 2563,4264 2609,4310 P2.7
PB7: P2.8 R44.2 R45.1 U1.43 | length 1623.8
  Top Layer w11.8: U1.43@1858.16,4640.45 1858.16,4712.99 1915.57,4770.4 2264.59,4770.4 2273.15,4761.84 2273.15,4250.93 2265.05,4242.83 2265.05,4178.54 2275.37,4168.22 v1(2275.37,4166) ; v1(2321,4163) 2321,4208.46 R44.2 ; R45.1 P2.8
  Layer 1 w11.8: v1(2275.37,4166) 2276.87,4164.5 2319.5,4164.5 v1(2321,4163) 2562,4163 2609,4210 P2.8
PB8: P2.9 R46.2 R47.1 U1.45 | length 1763.5
  Top Layer w11.8: U1.45@1818.79,4640.45 1818.79,4698.79 1908.2,4788.2 2271.96,4788.2 2290.95,4769.21 2290.95,4183.42 2297.27,4177.1 2297.27,4149.56 2286.95,4139.24 2286.95,4098.05 v1(2323,4062) 2323,4110.54 R46.2 ; R47.1 2526.46,4110 P2.9
  Layer 1 w11.8: v1(2323,4062) 2561,4062 2609,4110 P2.9
PB9: P2.10 R48.2 R49.1 U1.46 | length 460.1
  Top Layer w11.8: v1(2322,3960) R48.2@2322,4008.46 ; R49.1 2526.46,4010 P2.10
  Layer 1 w11.8: v1(2322,3960) 2559,3960 2609,4010 P2.10
PB10: P2.11 R50.2 R51.1 U1.21 | length 1246.4
  Top Layer w11.8: U1.21 1917.21,4246.91 1924.13,4240 2019.31,4240 2159.88,4099.43 2159.88,3866.32 2155.78,3862.22 v1(2155.78,3860) ; v1(2322,3860) R50.2@2322,3909.46 ; R51.1 P2.11
  Layer 1 w11.8: v1(2155.78,3860) v1(2322,3860) 2569,3860 P2.11
PB11: P2.12 R52.2 R53.1 U1.22 | length 1306.6
  Top Layer w11.8: U1.22 1936.9,4268.42 1947.51,4257.8 2026.68,4257.8 2177.68,4106.8 v1(2177.68,3763.38) ; R52.2@2322.54,3811.97 R52.2 2323,3809.54 v1(2323,3764) ; R53.1 P2.12
  Layer 1 w11.8: v1(2177.68,3763.38) 2177.99,3763.69 2322.69,3763.69 v1(2323,3764) 2573,3764 P2.12
PB12: P2.13 R54.2 R55.1 U1.25 | length 1370
  Top Layer w11.8: U1.25 2027.45,4282.2 2198.1,4111.55 2198.1,3773.94 2199.58,3772.45 2199.58,3754.31 2198.1,3752.83 v1(2198.1,3660) ; R54.2 2323,3709.54 v1(2323,3660) ; R55.1 P2.13
  Layer 1 w11.8: v1(2198.1,3660) v1(2323,3660) 2559,3660 2609,3710 P2.13
PB13: P2.14 R56.2 R57.1 U1.26 | length 1494.2
  Top Layer w11.8: U1.26@2027.45,4392.42 2062.47,4392.42 2074.78,4380.11 2074.78,4260.04 2220,4114.83 v1(2220,3560) ; v1(2322,3562) 2322,3609.46 R56.2 ; R57.1 P2.14
  Layer 1 w11.8: v1(2220,3560) 2221,3561 2321,3561 v1(2322,3562) 2561,3562 2609,3610 P2.14
PB14: P2.15 R58.2 R59.1 U1.27 | length 1608.9
  Top Layer w11.8: U1.27 2056.98,4412.1 2058.86,4410.22 2069.84,4410.22 2092.58,4387.48 2092.58,4267.42 2240,4120 2240,3570.97 2241.9,3569.07 2241.9,3550.93 2240,3549.03 v1(2240,3460) ; R58.2 2323,3509.54 v1(2323,3460) ; R59.1 P2.15
  Layer 1 w11.8: v1(2240,3460) v1(2323,3460) 2569,3460 P2.15
PB15: P2.16 R60.2 R61.1 U1.28 | length 1634.8
  Top Layer w11.8: U1.28 2073.45,4431.79 2110.38,4394.85 2110.38,4289.62 2260,4140 2260,3473.5 2322.54,3410.97 R60.2 ; v1(2324,3356) R60.2@2324,3407.54 ; R61.1 2526.46,3410 P2.16
  Layer 1 w11.8: v1(2324,3356) 2555,3356 2609,3410 P2.16
SWCLK: P3.3 U1.37
SWDIO: P3.2 U1.34
VIN: B2.2 C1.2 C2.2 C3.2 C4.2 C5.2 C6.2 C7.2 C15.2 C16.2 C17.2 P3.1 P4.1 R1.1 R3.1 R5.1 R7.1 R9.1 R11.1 R13.1 R15.1 R17.1 R20.1 R22.1 R24.1 R26.1 R28.1 R30.1 R32.1 R34.1 R36.1 R38.1 R40.1 R42.1 R44.1 R46.1 R48.1 R50.1 R52.1 R54.1 R56.1 R58.1 R60.1 R62.2 U1.24 U1.36 U1.48 U2.2 | length 2800
  Top Layer w11.8: R28.1 R26.1 R24.1 R22.1 R20.1 R17.1 R15.1 R13.1 R11.1 R9.1 R7.1 R5.1 R3.1 R1.1 ; R60.1 R58.1 R56.1 R54.1 R52.1 R50.1 R48.1 R46.1 R44.1 R42.1 R40.1 R38.1 R36.1 R34.1 R32.1 R30.1
XTAL_INPUT: B2.8 C19.2 Y3.1
XTAL_OUTPUT: B2.9 C20.2 Y3.3
pads on no net: B1.1 B1.2 B1.3 B1.4 B1.5 B1.6 B1.7 B1.8 B1.9 B1.10 B1.11 B1.12 B1.13 B1.14 B1.15 B1.16 B1.17 B1.18 B1.19 B1.20 B1.21 B1.22 B1.23 B1.24 B1.25 B2.4 B2.5 B2.6 B2.7 B2.10 B2.11 B2.12 B2.13 B2.14 B2.15 B2.16 B2.17 B2.18 B2.19 B2.20 B2.21 B2.22 B2.23 B2.24 B2.26 B2.27 B2.28 B2.29 B2.30 B2.31 B2.32 B2.33 B2.34 B2.35 B2.36 B2.37 B2.38 B2.39 B2.40 B2.41 B2.42 B2.43 B2.44 B2.45 B2.46 B2.47 J1.0 J3.2 J3.3 J3.MH1 J3.MH2 U1.1 U1.2 U1.9